# Altium PCB V_1.PcbDoc
Units mm, origin at the board's own origin, x right, y up, seen from the top; angles counter-clockwise.
Board outline 152.4 x 101.6 mm, 2 copper layers (Top Layer, Bottom Layer); 6 components, 10 nets, 86 pads, 13 vias.
Unrouted connection lines stored in the file: 1.
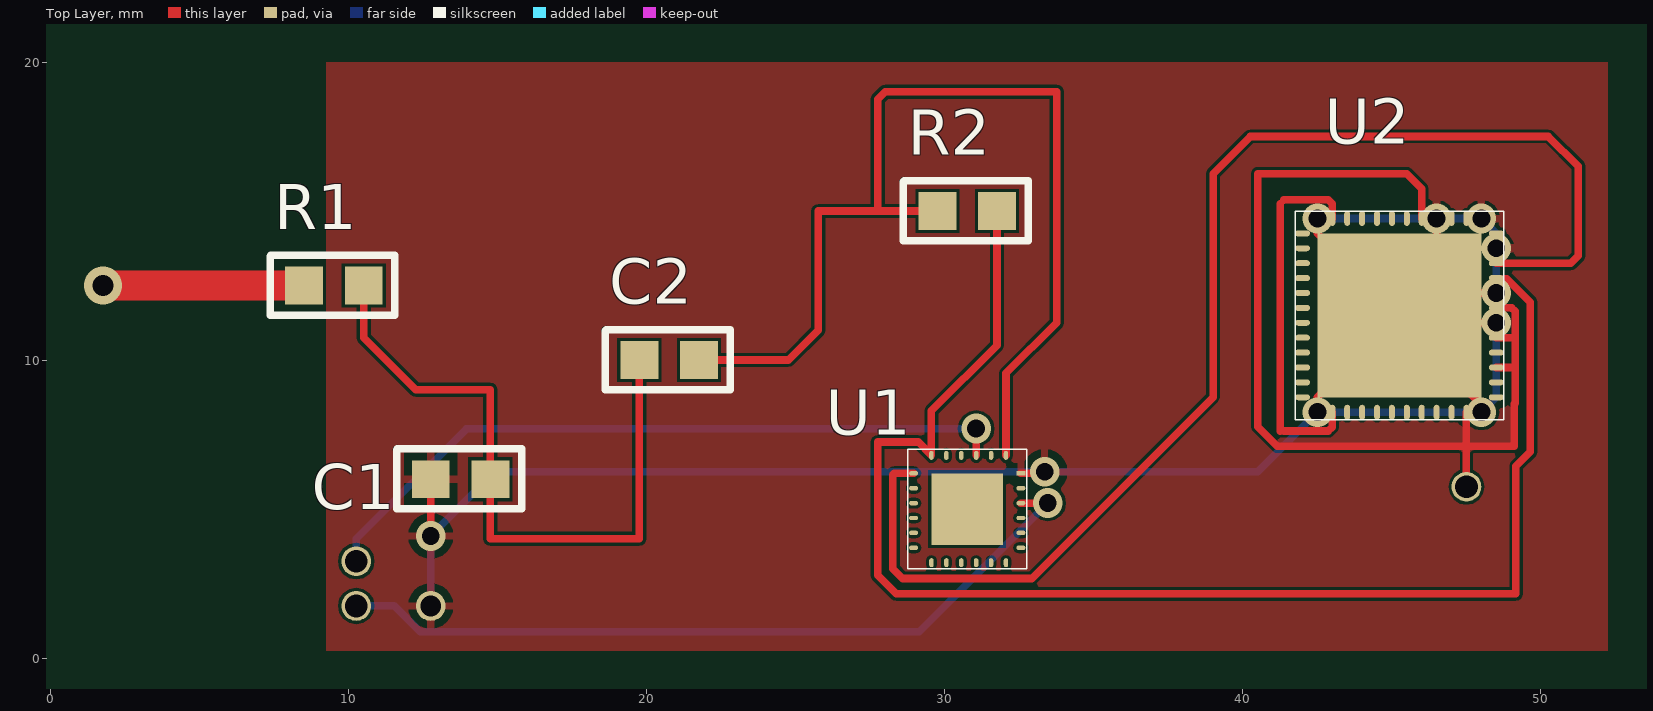
[diagram p0: Top Layer view]
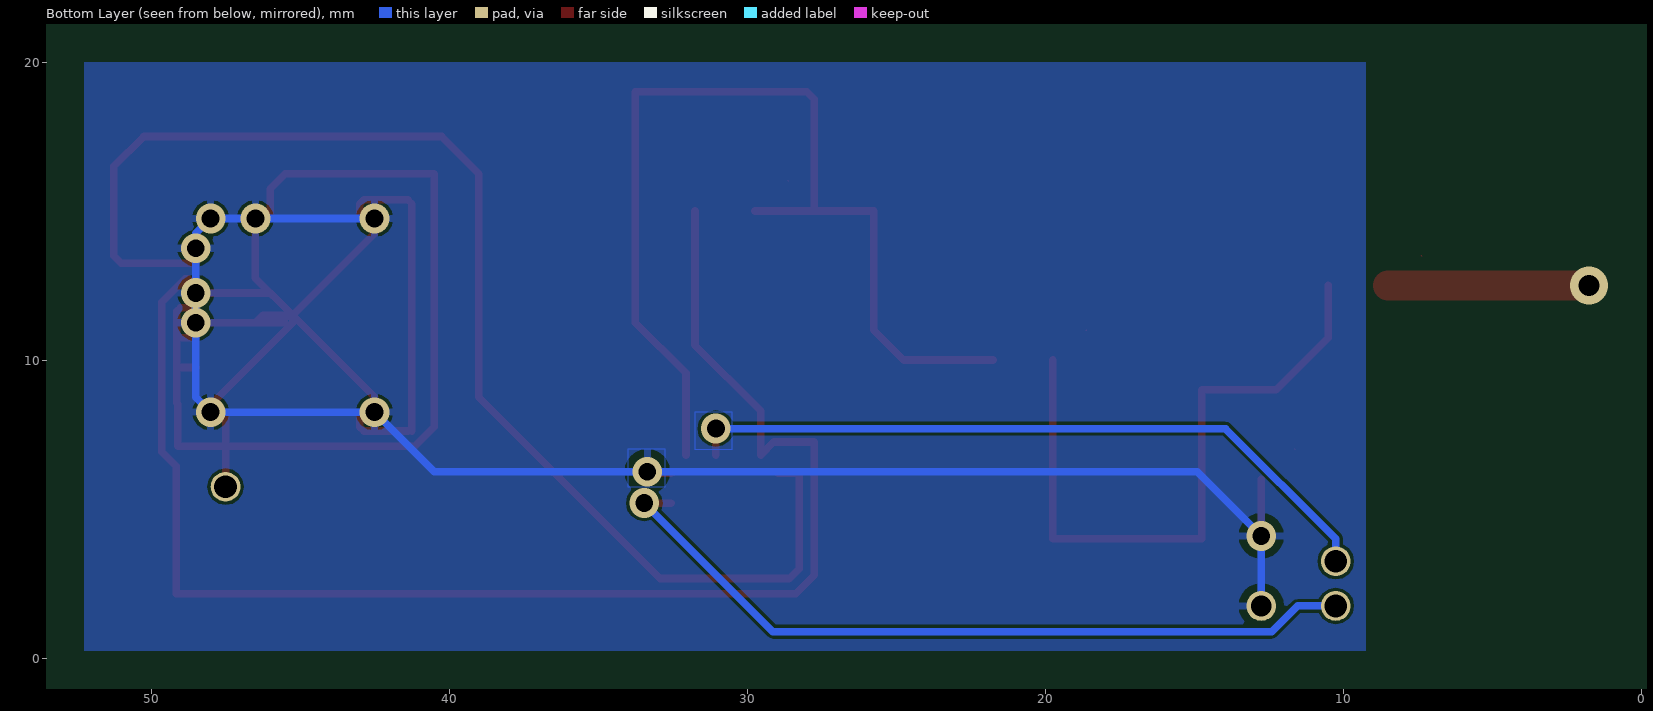
[diagram p1: Bottom Layer view, seen from below]

## Layer stack, top to bottom
Top Layer: signal copper 0.0356
Dielectric: dielectric 0.32, FR-4, Dk 4.8
Bottom Layer: signal copper 0.0356

## Board outline
-31.85,-34.6 120.55,-34.6 120.55,67 -31.85,67

## Design rules (kind name [scope] priority, off if disabled: settings)
Clearance [All] p1: gap=0.1
PolygonConnect [All] p1: connectstyle=Relief reliefconductorwidth=0.254 reliefentries=4 polygonreliefangle="90 Angle" airgapwidth=0.254
RoutingVias [All] p1: holewidth=0.711 width=1.27 viastyle="Through Hole" minholewidth=0.711 minwidth=1.27 maxholewidth=0.711 maxwidth=1.27
SilkscreenOverComponentPads [All] p1: minsilkscreentomaskgap=0.254
SolderMaskExpansion [All] p1: expansion=0.102
Width [All] p1: maxlimit=0.254 minlimit=0.254 preferedwidth=0.254
27 further rules are at their usual default settings.

## Components (designator, comment, footprint, x,y, rotation, side; value= is the part's Value field where it differs from the comment)
C1 "2.2p" C_0805 12.75,6 r0 top
C2 "2.2p" C_0805 19.75,10 r0 top
R1 "6.8k" R_0805 8.5,12.5 r0 top
R2 "2.2k" R_0805 29.75,15 r0 top
U1 "ADA4932-2" ADA4932-2 28.75,3 r0 top
U2 "ADS61B49" ADS61B49 41.75,8 r0 top

## Footprints (in the part's own frame and the unit in brackets; to place one, negate y for a bottom-side part, rotate by r counter-clockwise, add the part's x,y. Pads: shape width x height; smd on the part's side, far side on the other; paste and mask are expansions set on the pad)
ADA4932-2 [mm]
  rect 0.3x0.15 smd: 1(3.8,3.2)
  oval 0.3x0.15 smd: 2(3.8,2.7) 3(3.8,2.2) 4(3.8,1.7) 5(3.8,1.2) 6(3.8,0.7) 13(0.2,0.7) 14(0.2,1.2) 15(0.2,1.7) 16(0.2,2.2) 17(0.2,2.7) 18(0.2,3.2)
  oval 0.15x0.3 smd: 7(3.3,0.2) 8(2.8,0.2) 9(2.3,0.2) 10(1.8,0.2) 11(1.3,0.2) 12(0.8,0.2) 19(0.8,3.8) 20(1.3,3.8) 21(1.8,3.8) 22(2.3,3.8) 23(2.8,3.8) 24(3.3,3.8)
  rect 2.4x2.4 smd: 25(2,2)
  silkscreen extent 0,0 4,4
ADS61B49 [mm]
  rect 0.2x0.5 smd: 1(0.75,6.75)
  oval 0.2x0.5 smd: 2(1.25,6.75) 3(1.75,6.75) 4(2.25,6.75) 5(2.75,6.75) 6(3.25,6.75) 7(3.75,6.75) 8(4.25,6.75) 9(4.75,6.75) 10(5.25,6.75) 11(5.75,6.75) 12(6.25,6.75) 25(6.25,0.25) 26(5.75,0.25) 27(5.25,0.25) 28(4.75,0.25) 29(4.25,0.25) 30(3.75,0.25) 31(3.25,0.25) 32(2.75,0.25) 33(2.25,0.25) 34(1.75,0.25) 35(1.25,0.25) 36(0.75,0.25)
  oval 0.5x0.2 smd: 13(6.75,6.25) 14(6.75,5.75) 15(6.75,5.25) 16(6.75,4.75) 17(6.75,4.25) 18(6.75,3.75) 19(6.75,3.25) 20(6.75,2.75) 21(6.75,2.25) 22(6.75,1.75) 23(6.75,1.25) 24(6.75,0.75) 37(0.25,0.75) 38(0.25,1.25) 39(0.25,1.75) 40(0.25,2.25) 41(0.25,2.75) 42(0.25,3.25) 43(0.25,3.75) 44(0.25,4.25) 45(0.25,4.75) 46(0.25,5.25) 47(0.25,5.75) 48(0.25,6.25)
  rect 5.5x5.5 smd: 49(3.5,3.5)
  silkscreen extent 0,0 7,7
C_0805 [mm]
  rect 1.27x1.27 smd: 1(0,0) 2(2,0)
  Top Layer lines w0.05: -1.143,0.991 -1.118,1.016
  silkscreen extent -1.14,-0.99 3.05,1.02
R_0805 [mm]
  rect 1.27x1.27 smd: 1(0,0) 2(2,0)
  Top Layer lines w0.05: -1.143,0.991 -1.118,1.016
  silkscreen extent -1.14,-0.99 3.05,1.02

## Part data
C1 C2: library part C
R1 R2: library part R

## Free pads (board coordinates)
  round 1 hole 0.762: ""(10.25,1.75) ""(10.25,3.25) ""(47.5,5.75)
  round 1 hole 0.7: ""(12.75,1.75)

## Via types
v1: diameter 1, hole 0.6, Top Layer to Bottom Layer, 12 vias
v2: diameter 1.27, hole 0.711, Top Layer to Bottom Layer, 1 vias

## Nets (pads, with @x,y where several pads share a name; then routed paths per layer and width w, separated by ;. In a path a pad name is that pad's centre, name@x,y a point inside that pad or via, vN(x,y) a via of type N, cw(c..) or ccw(c..) an arc to the next point about the centre after c; other vN are vias at no path point)
"1.8 V": U2.2 U2.35 | length 12
  Top Layer w0.254: 41.25,7.619 41.25,15.25 ; 41.369,7.619 42.869,7.619 43,7.75 U2.35 ; 41.369,15.369 41.381,15.381 42.869,15.381 43,15.25 U2.2
"3.3 V": pad.@47.5,5.75 U2.8 U2.18 U2.20 U2.22 U2.24 U2.26 | length 33
  Top Layer w0.254: U2.8 46,15.75 45.5,16.25 40.5,16.25 40.5,7.77 41.159,7.111 47.5,7.111 ; pad.@47.5,5.75 47.5,7.111 ; U2.26 47.5,7.111 ; U2.22 49.131,9.75 ; U2.20 49.131,10.75 ; U2.18 49.012,11.75 49.131,11.631 49.131,10.75 ; 47.5,7.111 49.111,7.111 49.111,8.531 49.131,8.551 49.131,9.75 ; 49.131,9.75 49.131,10.75
"+ 5V": pad.@10.25,1.75 U1.3 | length 26.2
  Top Layer w0.254: U1.3 v1(33.45,5.2)
  Bottom Layer w0.254: pad.@10.25,1.75 11.531,1.75 12.393,0.888 29.138,0.888 v1(33.45,5.2)
"-5 V": pad.@10.25,3.25 U1.22 | length 24
  Top Layer w0.254: U1.22 v1(31.05,7.7)
  Bottom Layer w0.254: pad.@10.25,3.25 10.25,4 13.95,7.7 v1(31.05,7.7)
GND: C1.1 pad.@12.75,1.75 U1.1 U2.1 U2.9 U2.12 U2.14 U2.17 U2.19 U2.25 U2.36 U2.49 | length 81.6
  Top Layer w0.254: v1(12.75,4.1) C1.1 ; U1.1 v1@33.15,6.2 ; v1(42.5,8.25) 42.5,8.75 U2.49 ; v1(42.5,14.75) 42.5,14.25 U2.49 ; U2.49@45.5,11.25 U2.49@46.25,11.25 ; v1(46.5,14.75) 46.5,12.75 U2.49 ; v1(48,8.25) 48,8.5 45.25,11.25 U2.49 ; v1(48.5,11.25) U2.49@46.5,11.25 ; v1(48.5,12.25) 46,12.25 U2.49 ; U2.49 U2.49@46.5,11.25 ; U2.49 U2.49@46.25,11.25 ; U2.49 U2.49@46.25,11.5 ; U2.49@46.25,11.25 U2.49@46.5,11.25 ; U2.49@46.25,11.25 U2.49@46.25,11.5 ; U2.49@46.25,11.5 U2.49@46.5,11.25
  Bottom Layer w0.254: pad.@12.75,1.75 v1(12.75,4.1) 14.9,6.25 v1(33.35,6.25) 40.5,6.25 v1(42.5,8.25) v1(48,8.25) 48.5,8.75 v1(48.5,11.25) v1(48.5,12.25) v1(48.5,13.75) 48.5,14.25 v1(48,14.75) v1(46.5,14.75) v1(42.5,14.75)
NetC1_2: C1.2 C2.1 R1.2 | length 22.7
  Top Layer w0.254: R1.2 10.5,10.75 12.25,9 14.75,9 C1.2 14.75,4 19.75,4 C2.1
NetC2_2: C2.2 R2.1 U1.24 | length 35.2
  Top Layer w0.254: C2.2 24.75,10 25.75,11 25.75,15 27.75,15 ; R2.1 27.75,15 ; U1.24 32.05,9.55 33.75,11.25 33.75,19 28,19 27.75,18.75 27.75,15
NetR1_1: R1.1 | length 6.8
  Top Layer w1: v2(1.75,12.5) R1.1
NetR2_2: R2.2 U1.19 U2.16 | length 48.4
  Top Layer w0.254: R2.2 31.75,10.5 29.55,8.3 U1.19 29.1,7.25 27.75,7.25 27.742,7.242 27.742,2.782 28.363,2.161 49.161,2.161 49.161,6.443 49.639,6.921 49.639,11.941 48.849,12.731 48.761,12.731
NetU1_18: U1.18 U2.15 | length 43.8
  Top Layer w0.254: U1.18 28.3,6.2 28.25,6.15 28.25,3 28.581,2.669 32.919,2.669 39,8.75 39,16.25 40.25,17.5 50.25,17.5 51.25,16.5 51.25,13.5 51,13.25 U2.15
pads on no net: U1.2 U1.4 U1.5 U1.6 U1.7 U1.8 U1.9 U1.10 U1.11 U1.12 U1.13 U1.14 U1.15 U1.16 U1.17 U1.20 U1.21 U1.23 U1.25 U2.3 U2.4 U2.5 U2.6 U2.7 U2.10 U2.11 U2.13 U2.21 U2.23 U2.27 U2.28 U2.29 U2.30 U2.31 U2.32 U2.33 U2.34 U2.37 U2.38 U2.39 U2.40 U2.41 U2.42 U2.43 U2.44 U2.45 U2.46 U2.47 U2.48

## Polygon pours and split planes (outlines as drawn)
"3.3 V" on Top Layer "Top Layer 3.3V" (solid, pour order 20): 41.25,15.5 49,15.5 49,6.984 49.105,6.88 41.159,6.88
GND on Top Layer "Top Layer GND" (solid, remove dead copper, pour order 16): 9.25,20 52.25,20 52.25,0.25 9.25,0.25
"-5 V" on Bottom Layer "Bottom Layer -5V" (solid, pour order 24): 30.5,8.25 31.75,8.25 31.75,7 30.5,7
"+ 5V" on Bottom Layer "Bottom Layer +5V" (solid, pour order 22): 32.75,7 34,7 34,5.75 32.75,5.75
GND on Bottom Layer "Bottom Layer GND" (solid, remove dead copper, pour order 18): 9.25,20 52.25,20 52.25,0.25 9.25,0.25

## Silkscreen, mask and mechanical layers (free items; w line width, h text height)
Top Solder:
  lines w0.25: 0,0 52.5,0 52.5,20 0,20 0,0